# Altium PCB PCB1.PcbDoc (part 1 of 2)
Units mm, origin at the board's own origin, x right, y up, seen from the top; angles counter-clockwise.
Board outline 152.4 x 101.6 mm, 4 copper layers (Top Layer, Layer 1, Layer 2, Bottom Layer), stack 0.603 mm thick; 81 components, 109 nets, 446 pads, 110 vias.
Unrouted connection lines stored in the file: 160.
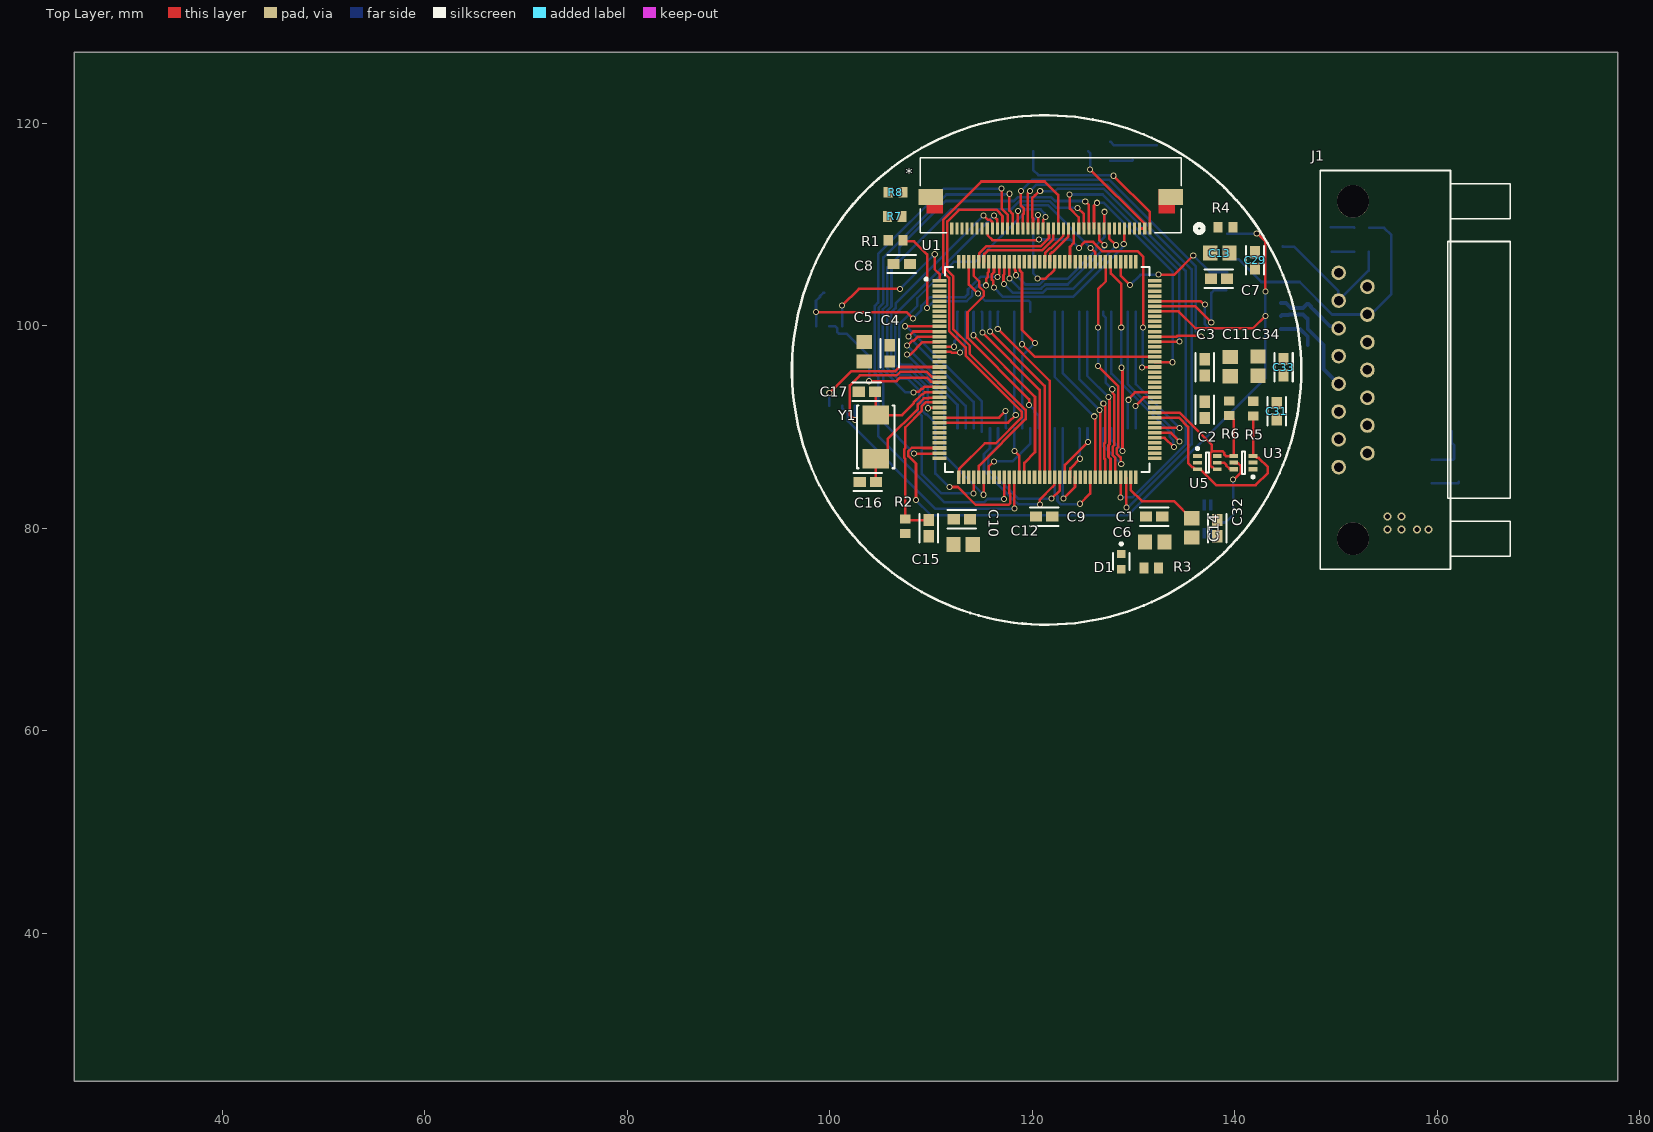
[diagram p0: Top Layer view]
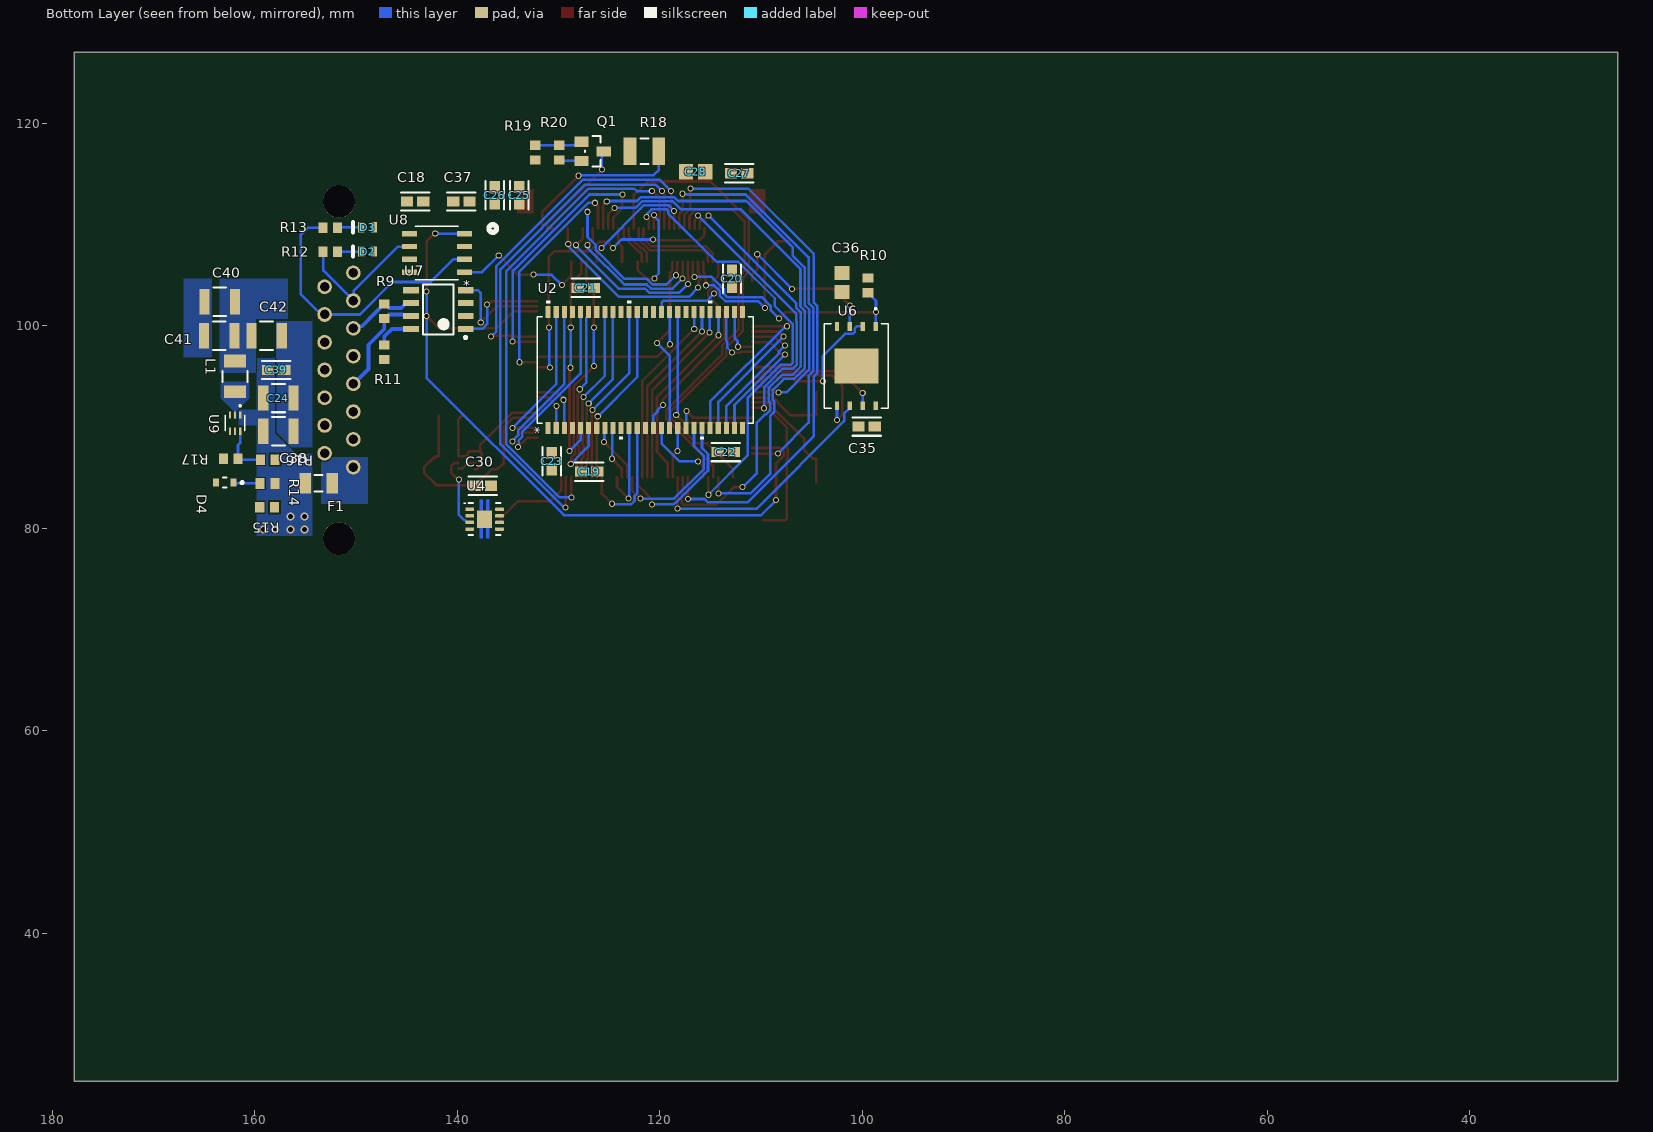
[diagram p1: Bottom Layer view, seen from below]
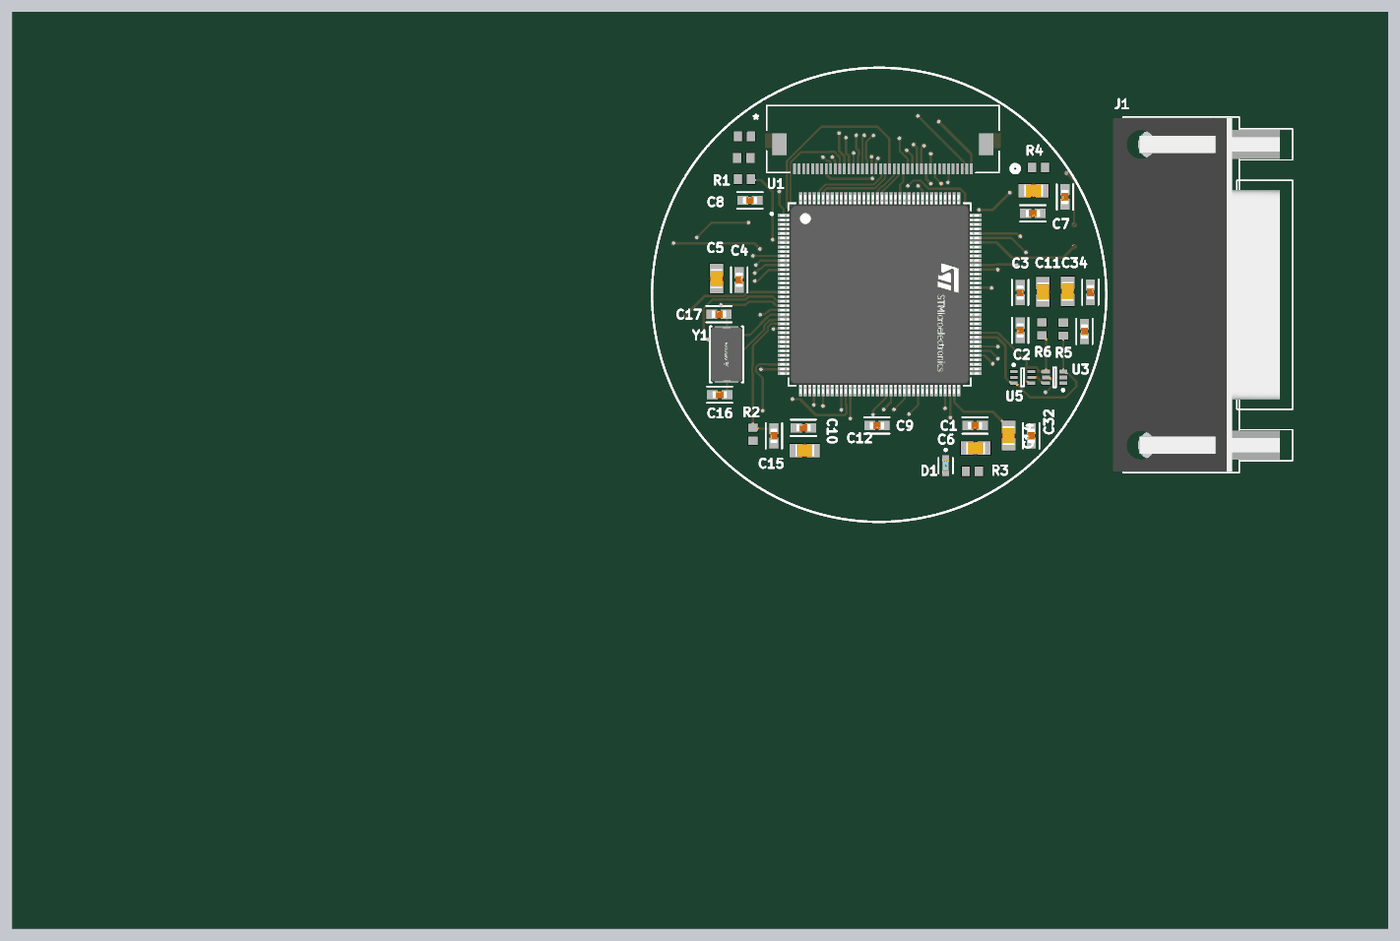
[diagram p3: 3D render of the assembled board from above, using the file's embedded part models]
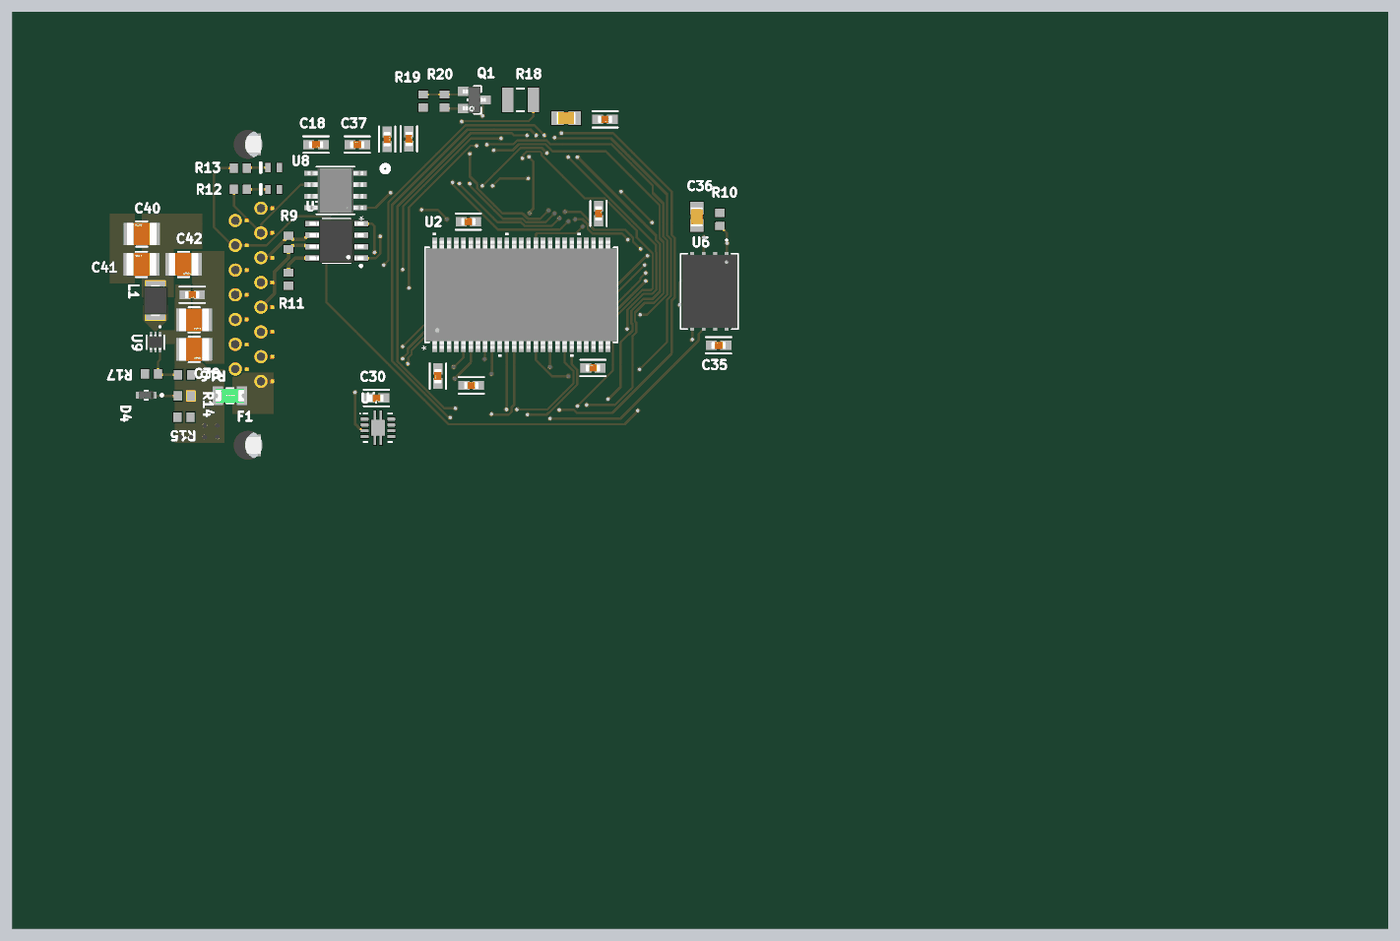
[diagram p4: 3D render of the assembled board from below, using the file's embedded part models]

## Layer stack, top to bottom
Top Solder: solder mask 0.0102, Solder Resist, Dk 3.5
Top Layer: signal copper 0.0356
Dielectric 2: prepreg 0.0711, PP-006, Dk 4.1
Layer 1: signal copper 0.035
Dielectric 1: dielectric 0.32, FR-4, Dk 4.8
Layer 2: signal copper 0.035
Dielectric 3: prepreg 0.0711, PP-006, Dk 4.1
Bottom Layer: signal copper 0.0356
Bottom Solder: solder mask 0.0102, Solder Resist, Dk 3.5

## Board outline
25.4,25.4 177.8,25.4 177.8,127 25.4,127

## Design rules (kind name [scope] priority, off if disabled: settings)
Clearance [All] p1: gap=0.15 ignorepadtopadclearanceinfootprint=FALSE
DiffPairsRouting [All] p1: maxlimit=0.254 minlimit=0.254 mostfreqgap=0.254 toplayer_minwidth=0.381 toplayer_maxwidth=0.381 toplayer_prefwidth=0.381 midlayer1_minwidth=0.381 midlayer1_maxwidth=0.381 midlayer1_prefwidth=0.381 midlayer2_minwidth=0.381 midlayer2_maxwidth=0.381 midlayer2_prefwidth=0.381 bottomlayer_minwidth=0.381 bottomlayer_maxwidth=0.381 bottomlayer_prefwidth=0.381 maxuncoupledlength=12.7
PolygonConnect [All] p1: connectstyle=Direct reliefconductorwidth=0.254 reliefentries=4 polygonreliefangle="90 Angle" airgapwidth=0.254
RoutingVias [All] p1: holewidth=0.4 width=0.6 viastyle="Through Hole" minholewidth=0.2 minwidth=0.4 maxholewidth=2 maxwidth=10
SolderMaskExpansion [All] p1: expansion=0.102 istentingtop=FALSE
SupplyNets "Schematic Supply Nets_2" [InNet('VBAT')] p1: voltage=0.000
SupplyNets "Schematic Supply Nets_1" [InNet('3V3')] p2: voltage=0.000
SupplyNets "Schematic Supply Nets" [InNet('GND')] p3: voltage=0.000
Width [All] p1: maxlimit=10 minlimit=0.15 preferedwidth=0.254
29 further rules are at their usual default settings.

## Classes and differential pairs
component class Power: C24 C38 C39 C40 C41 C42 D4 L1 Q1 R14 R15 R16 R17 R18 R19 R20 U9
component class OBD2: C18 C37 D2 D3 F1 J1 R9 R11 R12 R13 U8
component class Audio: C30 C31 C32 C33 C34 U3 U4 U5
component class "DRAM and QSPI": C19 C20 C21 C22 C23 C35 C36 R10 U2 U6
component class LCD: * C25 C26 C27 C28 C29 R4
component class "Digital - STM32": C1 C2 C3 C4 C5 C6 C7 C8 C9 C10 C11 C12 C13 C14 C15 C16 C17 D1 R1 R2 R3 R5 R6 R7 R8 U1 Y1
differential pair ISO15765-4_CAN: +ISO15765-4_CAN_P -ISO15765-4_CAN_N

## Components (designator, comment, footprint, x,y, rotation, side; value= is the part's Value field where it differs from the comment)
* "40P FPC 0.5mm" CONN_62684-402100ALF_AMP 121.822,112.882 r180 top
C1 "100n" FP-GRM188-0_1-e0_2_0_55-IPC_A 132.035,81.153 r0 top
C2 "100n" FP-GRM188-0_1-e0_2_0_55-IPC_A 137.033,91.694 r270 top
C3 "100n" FP-GRM188-0_1-e0_2_0_55-IPC_A 137.033,95.885 r90 top
C4 "100n" FP-GRM188-0_1-e0_2_0_55-IPC_A 105.918,97.282 r90 top
C5 "1u" CAPC2013X135X45LL10T25 103.408,97.43 r270 top
C6 "1u" CAPC2013X135X45LL10T25 132.087,78.643 r180 top
C7 "100n" FP-GRM188-0_1-e0_2_0_55-IPC_A 138.43,104.648 r0 top
C8 "100n" FP-GRM188-0_1-e0_2_0_55-IPC_A 107.105,106.094 r180 top
C9 "100n" FP-GRM188-0_1-e0_2_0_55-IPC_A 121.158,81.153 r0 top
C10 "100n" FP-GRM188-0_1-e0_2_0_55-IPC_A 113.03,80.899 r180 top
C11 "1u" CAPC2013X135X45LL10T25 139.543,95.959 r270 top
C12 "1u" CAPC2013X135X45LL10T25 113.169,78.389 r0 top
C13 "2u2" CAPC2013X135X45LL10T25 138.515,107.17 r180 top
C14 "2u2" CAPC2013X135X45LL10T25 135.741,80.037 r90 top
C15 "100n" FP-GRM188-0_1-e0_2_0_55-IPC_A 109.759,80.006 r270 top
C16 "16p" FP-GRM188-0_1-e0_2_0_55-IPC_A 103.754,84.567 r180 top
C17 "16p" FP-GRM188-0_1-e0_2_0_55-IPC_A 103.667,93.487 r180 top
C18 "100n" FP-GRM188-0_1-e0_2_0_55-IPC_A 144.145,112.268 r180 bottom
C19 "100n" FP-GRM188-0_1-e0_2_0_55-IPC_A 126.96,85.598 r0 bottom
C20 "100n" FP-GRM188-0_1-e0_2_0_55-IPC_A 112.862,104.636 r90 bottom
C21 "100n" FP-GRM188-0_1-e0_2_0_55-IPC_A 127.285,103.736 r0 bottom
C22 "100n" FP-GRM188-0_1-e0_2_0_55-IPC_A 113.473,87.526 r0 bottom
C23 "100n" FP-GRM188-0_1-e0_2_0_55-IPC_A 130.648,86.626 r270 bottom
C24 "10u" FP-1210-MFG 157.645,92.857 r180 bottom
C25 "100n" FP-GRM188-0_1-e0_2_0_55-IPC_A 133.858,112.903 r90 bottom
C26 "100n" FP-GRM188-0_1-e0_2_0_55-IPC_A 136.271,112.863 r90 bottom
C27 "100n" FP-GRM188-0_1-e0_2_0_55-IPC_A 112.141,115.062 r180 bottom
C28 "1u" CAPC2013X135X45LL10T25 116.451,115.199 r180 bottom
C29 "100n" FP-GRM188-0_1-e0_2_0_55-IPC_A 141.986,106.466 r270 top
C30 "100n" FP-GRM188-0_1-e0_2_0_55-IPC_A 137.454,84.201 r180 bottom
C31 "100n" FP-GRM188-0_1-e0_2_0_55-IPC_A 144.145,91.567 r270 top
C32 "100n" FP-GRM188-0_1-e0_2_0_55-IPC_A 138.251,80.018 r270 top
C33 "100n" FP-GRM188-0_1-e0_2_0_55-IPC_A 144.807,95.914 r90 top
C34 "1u" CAPC2013X135X45LL10T25 142.297,96.015 r270 top
C35 "100n" FP-GRM188-0_1-e0_2_0_55-IPC_A 99.568,90.043 r0 bottom
C36 "1u" CAPC2013X135X45LL10T25 101.985,104.271 r270 bottom
C37 "100n" FP-GRM188-0_1-e0_2_0_55-IPC_A 139.573,112.268 r0 bottom
C38 "10u" FP-1210-MFG 157.639,89.586 r180 bottom
C39 "100n" FP-GRM188-0_1-e0_2_0_55-IPC_A 157.861,95.631 r180 bottom
C40 "22u" FP-1210-MFG 163.449,102.362 r0 bottom
C41 "22u" FP-1210-MFG 163.478,99 r0 bottom
C42 "22u" FP-1210-MFG 158.814,99 r180 bottom
D1 "LTST-C191TBKT" FP-LTST-C191TBKT-MFG 128.778,76.708 r270 top
D2 "CD0603-B00340" BOUR-0603_V 148.844,107.315 r0 bottom
D3 "CD0603-B00340" BOUR-0603_V 148.844,109.728 r0 bottom
D4 "CZRU52C3V3" FP-0603-SOD-523F-MFG 162.944,84.514 r0 bottom
F1 "0466005.NR" FP-0466-MFG 153.67,84.455 r180 bottom value=0.011Ω
J1 "D15P33E4PA00LF" CONN_D15P33E4PA00LF_AMP 161.163,95.631 r270 top
L1 "2u2" BOUR-CM322522_V 161.925,94.996 r270 bottom
Q1 "FDN337N" FP-527AG-MFG 126.619,117.221 r180 bottom
R1 "10k" RESC1608X55X30ML15T15 106.494,108.435 r0 top
R2 "10k" RESC1608X55X30ML15T15 107.449,80.194 r270 top
R3 "100" RESC1608X55X30ML15T15 131.736,76.073 r0 top
R4 "10k" RESC1608X55X30ML15T15 139.07,109.724 r0 top
R5 "4k7" RESC1608X55X30ML15T15 141.799,91.82 r90 top
R6 "4k7" RESC1608X55X30ML15T15 139.445,91.855 r90 top
R7 "4k7" RESC1608X55X30ML15T15 106.422,110.789 r180 top
R8 "4k7" RESC1608X55X30ML15T15 106.494,113.183 r180 top
R9 "120" RESC1608X55X30ML15T15 147.193,101.436 r270 bottom
R10 "4k7" RESC1608X55X30ML15T15 99.431,103.983 r90 bottom
R11 "4k7" RESC1608X55X30ML15T15 147.193,97.372 r90 bottom
R12 "1k" RESC1608X55X30ML15T15 152.527,107.315 r180 bottom
R13 "1k" RESC1608X55X30ML15T15 152.527,109.669 r180 bottom
R14 "200k" RESC1608X55X30ML15T15 158.722,84.428 r0 bottom
R15 "100k" RESC1608X55X30ML15T15 158.759,82.074 r180 bottom
R16 "135k" RESC1608X55X30ML15T15 158.706,86.782 r180 bottom
R17 "30k" RESC1608X55X30ML15T15 162.36,86.87 r0 bottom
R18 "ERJ-L14KF10CU" RESC3225X70X50NL20T20 121.511,117.221 r0 bottom
R19 "10" RESC1608X55X30ML15T15 132.275,117.094 r270 bottom
R20 "10k" RESC1608X55X30ML15T15 129.921,117.094 r270 bottom
U1 "STM32F750Z8T6" FP-LQFP144-1A-MFG 121.465,95.677 r0 top
U2 "IS42S16100H-7TL" TSOPII_50L_400MIL_ISI 121.412,95.631 r90 bottom
U3 "MCP4018T-503E/LT" SC70-LT6_N 140.841,86.481 r180 top
U4 "TPA2006D1DRBR" DRB0008A_V 137.287,80.899 r180 bottom
U5 "MCP47A1T-A0E/LT" MCHP-SC70-LT6_N 137.287,86.487 r0 top
U6 "W25N512GVEIG" WSON8_8x6_E_WIN 100.584,96.012 r270 bottom
U7 "MCP2551-I/SN" MCHP-SN8_V 141.859,101.6 r0 bottom
U8 "L9613B013TR" L9613B013TR_STM 141.986,107.188 r0 bottom
U9 "TPS565242DRLR" SOT6_DRL_TEX 161.925,90.386 r270 bottom
Y1 "ABM7-16.000MHZ-D2Y-T" FP-ABM7-MFG 104.529,89.027 r90 top

## Footprints (in the part's own frame and the unit in brackets; to place one, negate y for a bottom-side part, rotate by r counter-clockwise, add the part's x,y. Pads: shape width x height; smd on the part's side, far side on the other; paste and mask are expansions set on the pad)
BOUR-0603_V [mm] "Chip Diode, 2-Leads, Body 1.80x1.00mm"
  rect 0.6x1 smd: 1(-0.625,0) 2(0.625,0)
  silkscreen extent 1.43,-0.5 1.43,0.5, body extent -0.9,-0.5 0.9,0.5, height 0.85
BOUR-CM322522_V [mm] "Inductor, 2-Leads, Body 3.2x2.5mm, Pitch 3.05mm"
  rect 1.25x2.15 smd: 1(-1.525,0) 2(1.525,0)
  silkscreen extent -0.54,-1.25 0.54,1.25, body extent -1.77,-1.35 1.77,1.35, height 2.4
CAPC2013X135X45LL10T25 [mm] "Chip Capacitor, 2-Leads, Body 2.10x1.35mm, IPC High Density"
  rect 1.4x1.5 smd: 1(-0.95,0) 2(0.95,0)
  body extent -1.05,-0.67 1.05,0.67, height 1.35
CONN_62684-402100ALF_AMP [mil]
  rect 12x47 smd paste+0 mask+0: 1(-385.12,129.19) 2(-365.38,129.19) 3(-345.62,129.19) 4(-325.87,129.19) 5(-306.13,129.19) 6(-286.38,129.19) 7(-266.63,129.19) 8(-246.88,129.19) 9(-227.12,129.19) 10(-207.38,129.19) 11(-187.63,129.19) 12(-167.88,129.19) 13(-148.13,129.19) 14(-128.38,129.19) 15(-108.63,129.19) 16(-88.88,129.19) 17(-69.13,129.19) 18(-49.38,129.19) 19(-29.63,129.19) 20(-9.88,129.19) 21(9.88,129.19) 22(29.62,129.19) 23(49.37,129.19) 24(69.12,129.19) 25(88.87,129.19) 26(108.63,129.19) 27(128.37,129.19) 28(148.12,129.19) 29(167.87,129.19) 30(187.62,129.19) 31(207.38,129.19) 32(227.12,129.19) 33(246.87,129.19) 34(266.62,129.19) 35(286.38,129.19) 36(306.12,129.19) 37(325.88,129.19) 38(345.62,129.19) 39(365.38,129.19) 40(385.12,129.19)
  rect 94x63 smd paste-47 mask-47: 41(-466.5,7.19) 42(466.5,7.19)
  Top Layer region: -419.5,-24.31 -419.5,69.69 -482.5,69.69 -482.5,-24.31
  Top Layer region: 482.5,-24.31 482.5,69.69 419.5,69.69 419.5,-24.31
  silkscreen extent -592,-146 507,146
CONN_D15P33E4PA00LF_AMP [mil]
  round 57 / inner round 60 / far side round 57 hole 37 paste-99999 mask+0: 1(377.56,-429.92) 2(269.69,-429.92) 3(161.81,-429.92) 4(53.94,-429.92) 5(-53.94,-429.92) 6(-161.81,-429.92) 7(-269.68,-429.92) 8(-377.56,-429.92) 9(323.62,-318.11) 10(215.75,-318.11) 11(107.87,-318.11) 12(0,-318.11) 13(-107.87,-318.11) 14(-215.75,-318.11) 15(-323.62,-318.11)
  round 126 / inner round 60 / far side round 126 hole 126 unplated paste-99999 mask-63: 16(-655.91,-374.02) 17(655.91,-374.02)
  silkscreen extent -776,-501 776,237, body extent -771,-546 771,183, height 495
DRB0008A_V [mm] "SON, 8-Leads, Body 3x3mm, Pitch 0.65mm, Thermal Pad 1.50 x 3.8mm"
  rrect29% 0.85x0.35 smd: 1(-1.475,0.975) 2(-1.475,0.325) 3(-1.475,-0.325) 4(-1.475,-0.975) 5(1.475,-0.975) 6(1.475,-0.325) 7(1.475,0.325) 8(1.475,0.975)
  rrect7% 1.5x1.75 smd: 9(0,0)
  Top Layer region: -0.185,0.875 -0.185,1.9 -0.465,1.9 -0.465,0.875
  Top Layer region: 0.185,-0.875 0.185,-1.9 0.465,-1.9 0.465,-0.875
  Top Layer region: -0.185,-0.875 -0.185,-1.9 -0.465,-1.9 -0.465,-0.875
  Top Layer region: 0.185,0.875 0.185,1.9 0.465,1.9 0.465,0.875
  silkscreen extent -2.02,-1.58 1.57,1.62, body extent -1.5,-1.5 1.5,1.5, height 1
FP-0466-MFG [mil]
  rect 45x80 smd paste+0 mask+0: 1(-52.5,0) 2(52.5,0)
  silkscreen extent -15,-32 15,32, body extent -62,-30 63,30, height 26
FP-527AG-MFG [mm]
  rect 1.4x1 smd paste+0 mask+0: 1(-1.1,0.95) 2(1.1,0) 3(-1.1,-0.95)
  silkscreen extent -0.76,-1.52 0.76,1.52, body extent -1.25,-1.46 1.25,1.46, height 1.12
FP-0603-SOD-523F-MFG [mm]
  rect 0.6x0.8 smd paste+0 mask+0: 1(-0.85,0) 2(0.85,0)
  silkscreen extent -1.85,-0.5 0.18,0.5, body extent -0.85,-0.45 0.85,0.45, height 0.85
FP-1210-MFG [mm]
  rect 1x2.5 smd paste+0 mask+0: 1(-1.5,0) 2(1.5,0)
  silkscreen extent -0.63,-1.4 0.63,1.4, body extent -1.65,-1.25 1.65,1.25, height 2.8
FP-ABM7-MFG [mm]
  rect 1.9x2.6 smd paste+0 mask+0: 1(-2.15,0) 2(2.15,0)
  silkscreen extent -3.1,-1.85 3.1,1.85, body extent -3.2,-1.95 3.2,1.95, height 0.25
FP-GRM188-0_1-e0_2_0_55-IPC_A [mm]
  rect 1.208x1.012 smd paste+0 mask+0: 1(-0.802,0) 2(0.802,0)
  silkscreen extent -1.41,-0.91 1.41,0.91, body extent -1.91,-1.01 1.91,1.01, height 0.25
FP-LQFP144-1A-MFG [mm]
  rect 1.35x0.35 smd paste+0 mask+0: 1(-10.625,8.75) 2(-10.625,8.25) 3(-10.625,7.75) 4(-10.625,7.25) 5(-10.625,6.75) 6(-10.625,6.25) 7(-10.625,5.75) 8(-10.625,5.25) 9(-10.625,4.75) 10(-10.625,4.25) 11(-10.625,3.75) 12(-10.625,3.25) 13(-10.625,2.75) 14(-10.625,2.25) 15(-10.625,1.75) 16(-10.625,1.25) 17(-10.625,0.75) 18(-10.625,0.25) 19(-10.625,-0.25) 20(-10.625,-0.75) 21(-10.625,-1.25) 22(-10.625,-1.75) 23(-10.625,-2.25) 24(-10.625,-2.75) 25(-10.625,-3.25) 26(-10.625,-3.75) 27(-10.625,-4.25) 28(-10.625,-4.75) 29(-10.625,-5.25) 30(-10.625,-5.75) 31(-10.625,-6.25) 32(-10.625,-6.75) 33(-10.625,-7.25) 34(-10.625,-7.75) 35(-10.625,-8.25) 36(-10.625,-8.75) 73(10.625,-8.75) 74(10.625,-8.25) 75(10.625,-7.75) 76(10.625,-7.25) 77(10.625,-6.75) 78(10.625,-6.25) 79(10.625,-5.75) 80(10.625,-5.25) 81(10.625,-4.75) 82(10.625,-4.25) 83(10.625,-3.75) 84(10.625,-3.25) 85(10.625,-2.75) 86(10.625,-2.25) 87(10.625,-1.75) 88(10.625,-1.25) 89(10.625,-0.75) 90(10.625,-0.25) 91(10.625,0.25) 92(10.625,0.75) 93(10.625,1.25) 94(10.625,1.75) 95(10.625,2.25) 96(10.625,2.75) 97(10.625,3.25) 98(10.625,3.75) 99(10.625,4.25) 100(10.625,4.75) 101(10.625,5.25) 102(10.625,5.75) 103(10.625,6.25) 104(10.625,6.75) 105(10.625,7.25) 106(10.625,7.75) 107(10.625,8.25) 108(10.625,8.75)
  rect 0.35x1.35 smd paste+0 mask+0: 37(-8.75,-10.625) 38(-8.25,-10.625) 39(-7.75,-10.625) 40(-7.25,-10.625) 41(-6.75,-10.625) 42(-6.25,-10.625) 43(-5.75,-10.625) 44(-5.25,-10.625) 45(-4.75,-10.625) 46(-4.25,-10.625) 47(-3.75,-10.625) 48(-3.25,-10.625) 49(-2.75,-10.625) 50(-2.25,-10.625) 51(-1.75,-10.625) 52(-1.25,-10.625) 53(-0.75,-10.625) 54(-0.25,-10.625) 55(0.25,-10.625) 56(0.75,-10.625) 57(1.25,-10.625) 58(1.75,-10.625) 59(2.25,-10.625) 60(2.75,-10.625) 61(3.25,-10.625) 62(3.75,-10.625) 63(4.25,-10.625) 64(4.75,-10.625) 65(5.25,-10.625) 66(5.75,-10.625) 67(6.25,-10.625) 68(6.75,-10.625) 69(7.25,-10.625) 70(7.75,-10.625) 71(8.25,-10.625) 72(8.75,-10.625) 109(8.75,10.625) 110(8.25,10.625) 111(7.75,10.625) 112(7.25,10.625) 113(6.75,10.625) 114(6.25,10.625) 115(5.75,10.625) 116(5.25,10.625) 117(4.75,10.625) 118(4.25,10.625) 119(3.75,10.625) 120(3.25,10.625) 121(2.75,10.625) 122(2.25,10.625) 123(1.75,10.625) 124(1.25,10.625) 125(0.75,10.625) 126(0.25,10.625) 127(-0.25,10.625) 128(-0.75,10.625) 129(-1.25,10.625) 130(-1.75,10.625) 131(-2.25,10.625) 132(-2.75,10.625) 133(-3.25,10.625) 134(-3.75,10.625) 135(-4.25,10.625) 136(-4.75,10.625) 137(-5.25,10.625) 138(-5.75,10.625) 139(-6.25,10.625) 140(-6.75,10.625) 141(-7.25,10.625) 142(-7.75,10.625) 143(-8.25,10.625) 144(-8.75,10.625)
  silkscreen extent -12.07,-10.1 10.1,10.1, body extent -11.4,-11.4 11.4,11.4, height 0.25
FP-LTST-C191TBKT-MFG [mm]
  rect 0.8x0.8 smd paste+0 mask+0: 1(-0.75,0) 2(0.75,0)
  silkscreen extent -1.87,-0.8 0.85,0.8, body extent -1.25,-0.55 1.25,0.55, height 0.25
L9613B013TR_STM [mil]
  rect 57.5x21 smd paste+0 mask+0: 1(-107.25,75) 2(-107.25,25) 3(-107.25,-25) 4(-107.25,-75) 5(107.25,-75) 6(107.25,-25) 7(107.25,25) 8(107.25,75)
  silkscreen extent -84,-104 84,104, body extent -122,-99 122,99, height 69
MCHP-SC70-LT6_N [mm] "SOT23, 6-Leads, Body 2x1.25mm, Pitch 0.65mm, IPC Medium Density"
  rect 0.85x0.35 smd: 1(-0.975,0.65) 2(-0.975,0) 3(-0.975,-0.65) 4(0.975,-0.65) 5(0.975,0) 6(0.975,0.65)
  silkscreen extent -1.1,-1 0.15,1.5, body extent -0.63,-1 0.63,1, height 1.1
MCHP-SN8_V [mm] "SOIC, 8-Leads, Body 4.9x3.9mm, Pitch 1.27mm"
  rect 1.55x0.6 smd: 1(-2.7,1.905) 2(-2.7,0.635) 3(-2.7,-0.635) 4(-2.7,-1.905) 5(2.7,-1.905) 6(2.7,-0.635) 7(2.7,0.635) 8(2.7,1.905)
  silkscreen extent -2.82,-2.45 1.53,2.88, body extent -3,-2.45 3,2.45, height 1.75
RESC1608X55X30ML15T15 [mm] "Chip Resistor, 2-Leads, Body 1.60x0.80mm, IPC Low Density"
  rect 0.9x1.05 smd: 1(-0.725,0) 2(0.725,0)
  body extent -0.87,-0.48 0.87,0.48, height 0.55
RESC3225X70X50NL20T20 [mm] "Chip Resistor, 2-Leads, Body 3.20x2.50mm, IPC Medium Density"
  rect 1.25x2.7 smd: 1(-1.425,0) 2(1.425,0)
  silkscreen extent -0.4,-1.25 0.4,1.25, body extent -1.7,-1.35 1.7,1.35, height 0.7
SC70-LT6_N [mm] "SOT363, 6-Leads, Body 2x1.3mm, Pitch 0.65mm, Lead Span 2.1mm, IPC Medium Density"
  rect 0.85x0.4 smd: 1(-0.95,0.65) 2(-0.95,0) 3(-0.95,-0.65) 4(0.95,-0.65) 5(0.95,0) 6(0.95,0.65)
  silkscreen extent -1.07,-1.1 0.15,1.52, body extent -0.7,-1.1 0.7,1.1, height 1.1
SOT6_DRL_TEX [mil]
  rect 28x9 smd paste+0 mask+0: 1(-31.5,19.69) 2(-31.5,0) 3(-31.5,-19.69) 4(31.5,-19.69) 5(31.5,0) 6(31.5,19.69)
  silkscreen extent -71,-39 31,39, body extent -34,-34 34,34, height 24
TSOPII_50L_400MIL_ISI [mil]
  rect 47x20 smd paste+0 mask+0: 1(-226,377.95) 2(-226,346.46) 3(-226,314.96) 4(-226,283.46) 5(-226,251.97) 6(-226,220.47) 7(-226,188.98) 8(-226,157.48) 9(-226,125.98) 10(-226,94.49) 11(-226,62.99) 12(-226,31.5) 13(-226,0) 14(-226,-31.5) 15(-226,-62.99) 16(-226,-94.49) 17(-226,-125.98) 18(-226,-157.48) 19(-226,-188.98) 20(-226,-220.47) 21(-226,-251.97) 22(-226,-283.46) 23(-226,-314.96) 24(-226,-346.46) 25(-226,-377.95) 26(226,-377.95) 27(226,-346.46) 28(226,-314.96) 29(226,-283.46) 30(226,-251.97) 31(226,-220.47) 32(226,-188.98) 33(226,-157.48) 34(226,-125.98) 35(226,-94.49) 36(226,-62.99) 37(226,-31.5) 38(226,0) 39(226,31.5) 40(226,62.99) 41(226,94.49) 42(226,125.98) 43(226,157.48) 44(226,188.98) 45(226,220.47) 46(226,251.97) 47(226,283.46) 48(226,314.96) 49(226,346.46) 50(226,377.95)
  silkscreen extent -270,-420 270,420, body extent -236,-415 236,415, height 47
WSON8_8x6_E_WIN [mil]
  rect 34x17 smd paste+0 mask+0: 1(-154.5,75) 2(-154.5,25) 3(-154.5,-25) 4(-154.5,-75) 5(154.5,-75) 6(154.5,-25) 7(154.5,25) 8(154.5,75)
  rect 136x171 smd paste+0 mask+0: 9(0,0)
  silkscreen extent -227,-125 165,125, body extent -159,-120 159,120, height 31

## Part data
C1 C2 C3 C4 C7 C8 C9 C10 C15 C16 C17 C18 C19 C20 C21 C22 C23 C25 C26 C27 C29 C30 C31 C32 C33 C35 C37 C39: library part CMP-2006-02792-2, "Chip Multilayer Ceramic Capacitors for General Purpose, 0603, 10uF, X5R, 15%, 20%, 6.3V", Capacitance=10uF, Case Code (Imperial)=0603, Case Code (Metric)=1608, Dielectric=X5R, Max Operating Temperature=85°C, Min Operating Temperature=-55°C, Package Quantity=4000, Tolerance=20%, Voltage=6.3V, Case/Package=0603, Depth=0.8mm, Height=0.8mm, Lead Free="Lead Free", Length=1.6mm, Material=Ceramic, Mount="Surface Mount", Packaging="Tape and Reel", Radiation Hardening=No, REACH SVHC="No SVHC", Termination=SMD/SMT, Thickness=0.035inch, Voltage Rating=6.3V, Voltage Rating (DC)=6.3V, Width=0.031inch
C5 C6 C11 C12 C13 C14 C28 C34 C36: library part CMP-1662-00015-2, "Chip Capacitor, 4.7 uF, +/- 10%, 16 V, -55 to 85 degC, 0805 (2012 Metric), RoHS, Tape and Reel", Capacitance="4.7 uF", Case Code (Imperial)=0805, Case Code (Metric)=2012, Max Operating Temperature="85 degC", Min Operating Temperature="-55 degC", Package Quantity=3000, PartNumber=GRM21BR61C475KA88L, Tolerance=10%, Type (Capacitors)=X5R, Voltage Rating="16 V", Case\/Package=0805, ComponentLink1Description="Manufacturer URL", ComponentLink1URL=http://www.murata.com/, ComponentLink2Description=Datasheet, ComponentLink2URL=http://search.murata.co.jp/Ceramy/image/img/A01X/G101/ENG/GRM21BR61C475KA88-01.pdf, DatasheetVersion=03/2016, Height="1.25 mm", Length="2 mm", Mount="Surface Mount", Mounting Technology="Surface Mount", PackageDescription="2-Pin Surface Mount Device, Body 2 x 1.25 mm", PackageReference=0805, Packaging="Tape and Reel", Pins=2, Radiation Hardening=No, REACH SVHC="No SVHC", RoHSCompliant=true, Voltage Rating (DC)="16 V", Width="1.25 mm"
C24 C38 C40 C41 C42: library part CMP-04427-007069-1, "CAP CER 1000PF 2KV X7R 1210", Capacitance=1nF, Case Code (Imperial)=1210, Case Code (Metric)=3225, Dielectric=X7R, Dielectric Material=Ceramic, Max Operating Temperature=125°C, Min Operating Temperature=-55°C, Package Quantity=1, Temperature Coefficient=30ppm/°C, Tolerance=10%, Voltage=2kV, Case/Package=1210, Depth=2.5mm, Dissipation Factor=2.5%, Height=1.7mm, Lead Free="Lead Free", Length=3.2mm, Mount="Surface Mount", Number of Pins=2, Packaging="Tape and Reel", Radiation Hardening=No, REACH SVHC="No SVHC", RoHS Compliant=Yes, Termination=SMD/SMT, Thickness=0.067inch, Voltage Rating=2kV, Voltage Rating (DC)=2kV, Width=2.5mm
D1: library part CMP-22017-000008-1, "LED BLUE CLEAR CHIP SMD", Case Code (Imperial)=0603, Case Code (Metric)=1608, Color=Blue, Forward Current=20mA, Forward Voltage=3.8V, Lens Color=Colorless, Max Operating Temperature=80°C, Max Power Dissipation=75mW, Min Operating Temperature=-20°C, Package Quantity=1, Power Dissipation=76mW, Reverse Voltage=5V, Case/Package=0603, Depth=1.6mm, Dominant Wavelength=475nm, Height=0.55mm, Illumination Color=Blue, Lead Free="Lead Free", Length=0.8mm, Lens Style=Diffused, Lens Transparency=Clear, Luminous Intensity=180mcd, Mount="Surface Mount", Number of Elements=1, Number of LEDs=1, Number of Pins=2, Packaging="Tape and Reel", Radiation Hardening=No, Test Current=20mA, Viewing Angle=130°, Wavelength=468nm, Width=0.8mm
D2 D3: library part CMP-2000-06081-1, "Schottky Barrier Chip Diode Serie, 30 mA, 370 mV, -40 to 125 degC, 2-Pin SMD (0603), RoHS, Tape and Reel", Manufacturer=Bourns, Maximum Continuous Forward Current=0.03A, Operating Temperature=-40to125C, Package Description="2-Pin Surface Mount Device, Body 1.7 x 0.9 mm", Package Reference=0603, Peak Forward Voltage=0.37@0.001AV, Peak Non-Repetitive Surge Current=0.5A, Peak Reverse Current=1@40VuA, Peak Reverse Repetitive Voltage=45V, Supplier_Package=Case0603, Configuration=Single, COO=TW, Datasheet URL=https://datasheet.ciiva.com/5831/714183-5831824.pdf, Datasheet Version=10/2009, Dimension=1.8(Max)x1(Max)mm, ECCN=EAR99, Family=CD0603B00340, HTS=8541100070, Manufacturer URL=http://www.bourns.com/, Mounting=SurfaceMount, Mounting Technology=SurfaceMount, Packaging=TapeandReel, Part No=CD0603-B00340, Peak Reverse Recovery Time=N/A, Pin_Count=2, RoHS=Yes, Supplier=Bourns, Type=SmallSignalSchottkyDiode
D4: library part CMP-20229-000003-1, "DIODE ZENER 3.3V 150MW 0603", Case/Package=SMD/SMT, Max Operating Temperature=125°C, Max Power Dissipation=150mW, Max Reverse Leakage Current=25uA, Min Operating Temperature=-55°C, Output Current=500mA, Package Quantity=1, Tolerance=5%, Voltage Rating (DC)=3.3V, Zener Current=5mA, Element Configuration=Single, Impedance=95R, Lead Free="Lead Free", Mount="Surface Mount", Packaging="Tape and Reel", Power Dissipation=150mW, Power Rating=150mW, Voltage Tolerance=5%, Zener Voltage=3.3V
F1: library part CMP-08605-000032-1, "FUSE BOARD MNT 5A 32VAC/VDC 1206", Fuse Current=5A, Fuse Interrupt Ac Current=50A, Fuse Voltage Drop=73.75mV, Manufacturer="Littelfuse Inc", Max Fuse Ac Voltage=32V, Package=0466, Resistance=0.011Ω, Temperature="-55°C to +90°C", Temperature Range High=+90°C, Temperature Range Low=-55°C, Automotive=No, Category=Fuse, ComponentLink2Description=Datasheet, ComponentLink2URL=https://www.littelfuse.com/~/media/electronics/datasheets/fuses/littelfuse_fuse_466_datasheet.pdf.pdf, Device Class L1="Circuit Protection", Device Class L2=Fuses, Device Class L3=unset, Digikey Description="FUSE BOARD MNT 5A 32VAC/VDC 1206", Fuse Blow Speed=Fast, Fuse I2T=2.5A2Sec, Fuse Interrupt Dc Current=50A, Height=0.66mm, Lead Free=Yes, Manufacturer Part Number=0466005.NR, Max Fuse Dc Voltage=32V, Mouser Description="Surface Mount Fuses 32V 5A VFA Slimline", Octopart=https://octopart.com/0466005.nr-littelfuse-143206, RoHS=TRUE, Voltage Rating=32V
J1: "No Description Available", Mfr_Name="Amphenol ICC", RefDes=RefDes, Type=Type
L1: library part CMP-1747-00008-1, "Chip Inductor / , 10 uH, +/- 10%, -40 to 125 degC, 1210 (3225 Metric), RoHS, Tape and Reel", Colour=White, Current Rating="1.5 A", Max Operating Temperature="85 degC", Min Operating Temperature="-55 degC", Package Quantity=100, ComponentLink1Description="Manufacturer URL", ComponentLink1URL=http://www.bourns.com/, ComponentLink2Description=Datasheet, ComponentLink2URL=http://www.bourns.com/docs/Product-Datasheets/cm322522.pdf, Connector Type=USB, Contact Material=Bronze, Contact Plating=Gold, DatasheetVersion=Aug-14, Gender=Female, Height="15.9 mm", Lead Pitch="2.5 mm", Mount="Through Hole", PackageDescription="2-Pin Surface Mount Device, Body 3.2 x 2.5 mm", PackageReference=1210, Packaging=Tray, Pins=4, Radiation Hardening=No, RoHSCompliant=true, Width="11.15 mm"
Q1: library part CMP-2000-06250-2, "MOSFET N-CH 30V 2.2A SSOT3", Case/Package=TO-236-3, Continuous Drain Current (ID)=2.2A, Drain to Source Breakdown Voltage=30V, Drain to Source Resistance=65mR, Gate to Source Voltage (Vgs)=8V, Input Capacitance=300pF, Max Operating Temperature=150°C, Max Power Dissipation=500mW, Min Operating Temperature=-55°C, Package Quantity=1, Threshold Voltage=700mV, Contact Plating=Tin, Current Rating=2.2A, Drain to Source Voltage (Vdss)=30V, Drain-source On Resistance-Max=65mR, Dual Supply Voltage=30V, Element Configuration=Single, Fall Time=4ns, Height=0.94mm, Lead Free="Lead Free", Length=2.92mm, Mount="Surface Mount", Nominal Vgs=700mV, Number of Elements=1, Number of Pins=3, On-State Resistance=65mR, Packaging="Tape and Reel", Polarity=N-CHANNEL, Power Dissipation=500mW, Rds On Max=65mR, REACH SVHC="No SVHC", Rise Time=10ns, RoHS Compliant=Yes, Series=-, Termination=SMD/SMT, Turn-Off Delay Time=17ns, Turn-On Delay Time=4ns, Voltage Rating (DC)=30V, Weight=0.03g, Width=3.05mm
R1 R2 R3 R4 R5 R6 R7 R8 R9 R10 R11 R12 R13 R14 R15 R16 R17 R19 R20: library part CMP-2000-00182-1, Manufacturer=Panasonic, Part Number=ERJ-3EKF1003V
R18: library part CMP-2005-03838-2, Manufacturer=Panasonic, Part Number=ERJ-L14KF10CU
U1: library part CMP-12105-000056-1, "IC MCU 32BIT 64KB FLASH 144LQFP", Ambient Temperature Range High=+85°C, Ambient Temperature Range Low=-40°C, Frequency=216MHz, Manufacturer=STMicroelectronics, Max Junction Temp=+105°C, Max Supply Voltage=3.6V, Min Supply Voltage=1.7V, Nominal Supply Current=12-216mA, Package=LQFP144-1A, Temperature="-40°C to +105°C", Automotive=No, Category=IC, ComponentLink2Description=Datasheet, ComponentLink2URL=https://www.st.com/resource/en/datasheet/stm32f750z8.pdf, Core Architecture="ARM Cortex-M7", Data Bus Width=32bits, Device Class L1="Integrated Circuits (ICs)", Device Class L2="Embedded Processors and Controllers", Device Class L3=Microcontrollers, Digikey Description="IC MCU 32BIT 64KB FLASH 144LQFP", Height=1.6mm, Interface=I2C,SPI,UART,USART,CAN,USB,LIN,IrDA,Ethernet,I2S,Other, Ipc Land Pattern Name=QFP50P2200X2200X160-144, Lead Free=Yes, Manufacturer Part Number=STM32F750Z8T6, Memory Size=64KBytes, Memory Type=FLASH, Mouser Description="MCU 32-Bit STM32F750Z8 ARM Cortex M7 RISC 64KB Flash 1.8V/2.5V/3.3V 144-Pin LQFP Tray", Number Of A/D Converters=3, Number Of Adc Channels=24, Number Of Cores=1, Number Of Ethernet Channels=1, Number Of I2C Channels=4, Number Of I/Os=114, Number Of Pwm Channels=33, Number Of Spi Channels=6, Number Of Timers/Counters=15, Number Of Uart Channels=8, Number Of Usb Channels=1, Octopart=https://octopart.com/stm32f750z8t6-stmicroelectronics-94048545, Ram Size=320KBytes, RoHS=TRUE, Standoff Height=0.05mm, Temperature Range High=+105°C, Temperature Range Low=-40°C
U2: "No Description Available", Mfr_Name=ISSI, RefDes=RefDes, Type=Type
U3: library part CMP-0188-00772-2, "7-Bit Single I2C Digital POT with Volatile Memory, 6-pin SC70, Extended Temperature, Tape and Reel", ComponentLink1Description="Manufacturer URL", ComponentLink1URL=http://www.microchip.com/, ComponentLink2Description=Datasheet, ComponentLink2URL=http://ww1.microchip.com/downloads/en/DeviceDoc/22147a.pdf, ComponentLink3Description="Package Specification", ComponentLink3URL=http://www.microchip.com/stellent/groups/techpub_sg/documents/packagingspec/en012702.pdf, DatasheetVersion="revA, Mar-2009", PackageDescription="6-Lead Plastic Small Outline Transistor (LT) [SC70]", PackageReference=SC70-LT6, PackageVersion="revBB, Aug-2009", RevisionNote="URLs added."
U4: library part CMP-0991-00129-2, "1.45-W Mono Class-D Audio Amplifier with 1.8 V Compatible Shutdown Voltage, -40 to 85 degC, 8-pin SON (DRB8), Green (RoHS & no Sb/Br)", Manufacturer="Texas Instruments", Output Power(W)=1.45, Supply Max(Max)(Volt)=5.5, Supply Min(Min)(Volt)=2.5, ComponentLink1Description="Manufacturer URL", ComponentLink1URL=http://www.ti.com/, ComponentLink2Description=Datasheet, ComponentLink2URL=http://www.ti.com/general/docs/lit/getliterature.tsp?genericPartNumber=TPA2006D1&fileType=pdf, ComponentLink3Description="Package Specification", ComponentLink3URL=http://www.ti.com/litv/pdf/mpds118h, DatasheetVersion=SLOS498A, Eco-Plan="Green (RoHS & no Sb/Br)", Mounting Technology="Surface Mount", PackageDescription="8-Pin Plastic Small Outline, Body 3 x 3 mm, Pitch 0.65 mm", PackageReference=DRB0008A, PackageVersion="4203482-2/K, 06/2012", PartNumber=TPA2006D1DRBR, PSRR(dB)=-75, Speaker Amp Type=Class-D, Speaker Channels=Mono, SubFamily="Dynamic Speaker"
U5: library part CMP-0188-01388-1, "6-Bit Volatile DAC with Command Code, 130 µA Typical Operating Current, -40 to 125 degC, 6-pin SC70 (LT6), Tape and Reel", Manufacturer=Microchip, ComponentLink1Description="Manufacturer URL", ComponentLink1URL=http://www.microchip.com, ComponentLink2Description=Datasheet, ComponentLink2URL=http://ww1.microchip.com/downloads/en/DeviceDoc/25154A.pdf, ComponentLink3Description="Package Specification", ComponentLink3URL=http://www.microchip.com/stellent/groups/techpub_sg/documents/packagingspec/en012702.pdf, ComponentLink4Description="Product URL", ComponentLink4URL=http://www.microchip.com/MCP47A1, DatasheetVersion="Rev. A", Mounting Technology="Surface Mount", PackageDescription="6-Lead Plastic Small Outline Transistor, 2 x 1.25 mm Body, 0.65 mm Pitch", PackageReference=SC70-LT6, PackageVersion=C04-151A, PartNumber=MCP47A1T-A0E/LT
U6: "No Description Available", Mfr_Name=Winbond, RefDes=RefDes, Type=Memory
U7: library part CMP-0186-00138-3, "High-Speed CAN Transceiver, /  1 Mb/s, 4.5 to 5.5 V, 8-Pin SOIC (SN), Industrial Temperature, RoHS, Tube", Manufacturer=Microchip, ComponentLink1Description="Manufacturer URL", ComponentLink1URL=http://www.microchip.com/, ComponentLink2Description=Datasheet, ComponentLink2URL=http://ww1.microchip.com/downloads/en/DeviceDoc/21667f.pdf, ComponentLink3Description="Package Specification", ComponentLink3URL=http://www.microchip.com/stellent/groups/techpub_sg/documents/packagingspec/en012702.pdf, DatasheetVersion="Rev. F, 07/2010", Mounting Technology="Surface Mount", PackageDescription="8-Pin Small Outline Integrated Circuit, Body 4.9 x 3.9 mm, Pitch 1.27 mm", PackageReference=SN8, RoHSCompliant=true
U8: "No Description Available", Mfr_Name=STMicroelectronics, RefDes=RefDes, Type=Type
U9: "No Description Available", Mfr_Name="Texas Instruments", RefDes=RefDes, Type=Type
Y1: library part CMP-27762-000095-1, "Crystal 16MHz ±20ppm 18pF SMD-2 6mm x 3.5mm", Case/Package=CSMD, ESR (Equivalent Series Resistance)=50R, Frequency=16MHz, Frequency Stability=30ppm, Frequency Tolerance=20ppm, Load Capacitance=18pF, Max Operating Temperature=85°C, Min Operating Temperature=-40°C, Operating Frequency="16 MHz", Package Quantity=1000, Resistor Type=Ceramic, Depth=3.5mm, Height=0.055inch, Lead Free="Lead Free", Length=6mm, Mount="Surface Mount", Number of Pins=2, Packaging="Tape and Reel", Radiation Hardening=No, Series=ABM7, Termination=SMD/SMT, Tolerance=20ppm, Width=3.3mm

## Via types
v1: diameter 0.6, hole 0.4, Top Layer to Bottom Layer, 104 vias
v2: diameter 0.8, hole 0.5, Top Layer to Bottom Layer, 6 vias

## Nets (pads, with @x,y where several pads share a name; then routed paths per layer and width w, separated by ;. In a path a pad name is that pad's centre, name@x,y a point inside that pad or via, vN(x,y) a via of type N, cw(c..) or ccw(c..) an arc to the next point about the centre after c; other vN are vias at no path point)
3V3: *.5 *.39 C1.1 C2.1 C3.1 C4.1 C5.2 C6.2 C7.1 C8.1 C9.1 C10.1 C11.2 C12.2 C18.1 C19.1 C20.1 C21.1 C22.1 C23.1 C25.1 C26.1 C27.1 C28.2 C30.1 C31.1 C32.1 C33.1 C34.2 C35.1 C36.2 C37.1 C40.1 C41.1 C42.1 L1.1 R2.2 R3.2 R4.2 R5.2 R6.2 R7.2 R8.2 R10.2 R16.2 U1.6 U1.17 U1.30 U1.32 U1.33 U1.39 U1.52 U1.62 U1.72 U1.84 U1.95 U1.108 U1.121 U1.131 U1.144 U2.1 U2.7 U2.13 U2.25 U2.38 U2.44 U3.1 U4.1 U4.6 U5.1 U5.6 U6.8 U7.3 U8.3
BL_PWM: R19.2 U1.110
CAN1_RX: U1.103 U7.4 | length 10.8
  Top Layer w0.254: U1.103@132.09,101.927 136.071,101.927 v1(137.668,100.33)
  Bottom Layer w0.254: v1(137.668,100.33) 137.668,103.251 137.922,103.505 U7.4@139.159,103.505
CAN1_TX: U1.104 U7.1 | length 9.5
  Top Layer w0.254: U1.104@132.09,102.427 136.62,102.427 136.939,102.108 v1(137.033,102.108)
  Bottom Layer w0.254: v1(137.033,102.108) 137.033,100.149 137.487,99.695 U7.1@139.159,99.695 U7.1@139.286,99.568
DAC_OUT: U3.6 U5.5 | length 1.9
  Top Layer w0.254: U5.5@138.262,86.487 138.938,86.487 139.145,86.28 139.145,86.211 139.451,85.904 139.818,85.904 U3.6@139.891,85.831
FMC_A0: U1.10 U2.21 | length 17
  Top Layer w0.254: v1(107.442,99.949) 107.453,99.938 110.829,99.938 U1.10@110.84,99.927
  Bottom Layer w0.254: v1(107.442,99.949) 107.508,99.883 107.631,99.883 115.012,92.502 U2.21@115.012,89.891 U2.21@115.012,89.548
FMC_A1: U1.11 U2.22 | length 15
  Top Layer w0.254: v1(107.765,98.933) 108.259,99.427 U1.11@110.84,99.427
  Bottom Layer w0.254: v1(107.765,98.933) 114.212,92.486 U2.22@114.212,89.891
FMC_A2: U1.12 U2.23 | length 14.1
  Top Layer w0.254: v1(107.638,98.044) 107.692,98.044 108.171,98.523 108.302,98.523 108.706,98.927 U1.12@110.84,98.927
  Bottom Layer w0.254: v1(107.638,98.044) 108.215,97.467 108.215,97.271 113.412,92.074 U2.23@113.412,89.891
FMC_A3: U1.13 U2.24 | length 13.1
  Top Layer w0.254: v1(107.638,97.155) 107.95,97.155 109.174,98.379 110.792,98.379 U1.13@110.84,98.427
  Bottom Layer w0.254: v1(107.638,97.155) 112.612,92.181 112.612,91.985 U2.24@112.612,89.891
FMC_A4: U1.14 U2.27 | length 5
  Top Layer w0.254: U1.14@110.84,97.927 v1(112.251,97.927)
  Bottom Layer w0.254: v1(112.251,97.927) 112.317,97.994 112.317,98.485 112.567,98.735 112.567,101.326 U2.27@112.612,101.371
FMC_A5: U1.15 U2.28 | length 6.3
  Top Layer w0.254: U1.15@110.84,97.427 111.935,97.427 112.022,97.34 v1(112.838,97.34)
  Bottom Layer w0.254: v1(112.838,97.34) 113.325,97.827 113.325,98.426 113.412,98.512 U2.28@113.412,101.371
FMC_A6: U1.50 U2.29 | length 19.3
  Top Layer w0.254: v1(114.173,99.06) 120.265,92.968 120.265,87.517 119.215,86.468 U1.50@119.215,85.052
  Bottom Layer w0.254: v1(114.173,99.06) 114.192,99.079 114.192,101.352 U2.29@114.212,101.371
FMC_A7: U1.53 U2.30 | length 18.7
  Top Layer w0.254: v1(115.062,99.314) 120.715,93.661 U1.53@120.715,85.052
  Bottom Layer w0.254: U2.30@115.012,101.371 115.037,101.346 115.037,99.339 v1(115.062,99.314)
FMC_A8: U1.54 U2.31 | length 18.6
  Top Layer w0.254: v1(115.824,99.441) 121.215,94.05 U1.54@121.215,85.052
  Bottom Layer w0.254: U2.31@115.812,101.371 115.818,101.365 115.818,99.447 v1(115.824,99.441)
FMC_A9: U1.55 U2.32 | length 18.5
  Top Layer w0.254: v1(116.586,99.695) 121.715,94.566 U1.55@121.715,85.052
  Bottom Layer w0.254: v1(116.586,99.695) 116.599,99.708 116.599,101.358 U2.32@116.612,101.371
FMC_A10: U1.56 U2.20 | length 14.6
  Top Layer w0.254: v1(120.737,82.354) 120.737,82.832 122.005,84.1 122.167,84.263 122.167,85.004 U1.56@122.215,85.052
  Bottom Layer w0.254: U2.20@115.812,89.891 115.818,89.885 115.818,87.915 115.224,87.321 115.224,85.698 118.395,82.527 118.446,82.527 118.619,82.354 v1(120.737,82.354)
FMC_A11: U1.57 U2.19 | length 14.4
  Top Layer w0.254: v1(121.909,82.931) 122.715,83.737 U1.57@122.715,85.052
  Bottom Layer w0.254: U2.19@116.612,89.891 116.612,88.138 115.628,87.154 115.628,85.865 118.562,82.931 v1(121.909,82.931)
FMC_BA0: U1.89
FMC_D0: U1.85 U2.2 | length 4.5
  Top Layer w0.254: v1(130.175,92.075) 131.027,92.927 U1.85@132.09,92.927
  Bottom Layer w0.254: v1(130.175,92.075) 130.193,92.057 130.193,89.909 U2.2@130.212,89.891
FMC_D1: U1.86 U2.3 | length 5.8
  Top Layer w0.254: v1(129.482,92.688) 129.482,92.779 130.13,93.427 U1.86@132.09,93.427
  Bottom Layer w0.254: U2.3@129.412,89.891 129.423,89.902 129.423,92.629 v1(129.482,92.688)
FMC_D2: U1.114 U2.5 | length 21.9
  Top Layer w0.254: U1.114@127.715,106.302 127.763,106.254 127.763,105.155 128.799,104.119 128.799,99.843 v1(128.778,99.822) ; v1(128.799,95.85) 128.865,95.783 128.865,95.568 128.905,95.528 v1(128.905,87.63)
  Bottom Layer w0.254: U2.5@127.812,89.891 127.812,88.723 v1(128.905,87.63) ; v1(128.778,99.822) 128.788,99.812 128.788,95.86 v1(128.799,95.85)